# Altium PCB I2C_module_v1.PcbDoc (part 1 of 4)
Units mil, origin at the board's own origin, x right, y up, seen from the top; angles counter-clockwise.
Board outline 3300 x 2890 mil, 2 copper layers (Top Layer, Bottom Layer); 41 components, 28 nets, 177 pads, 28 vias.
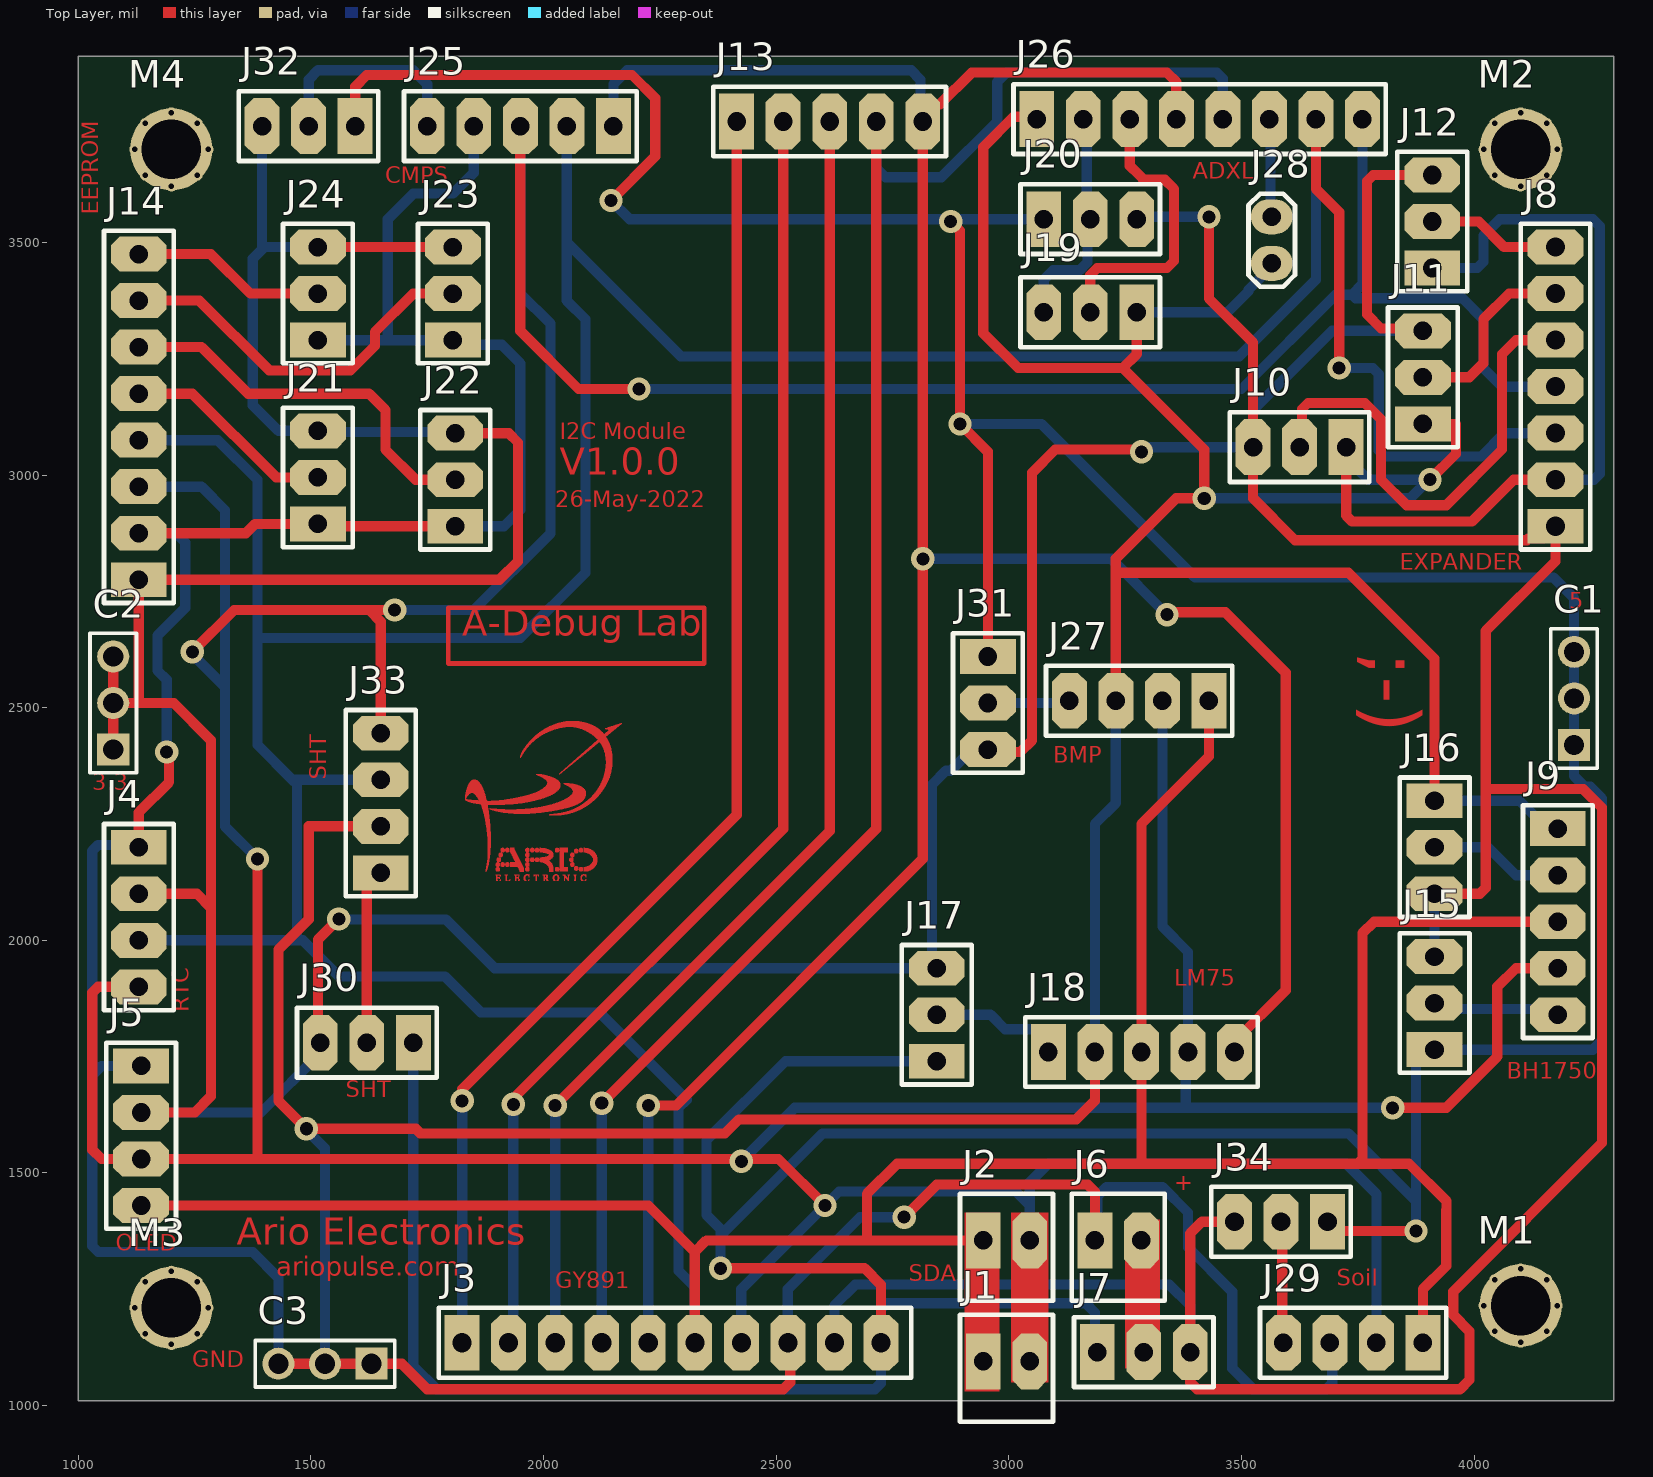
[diagram p0: Top Layer view]
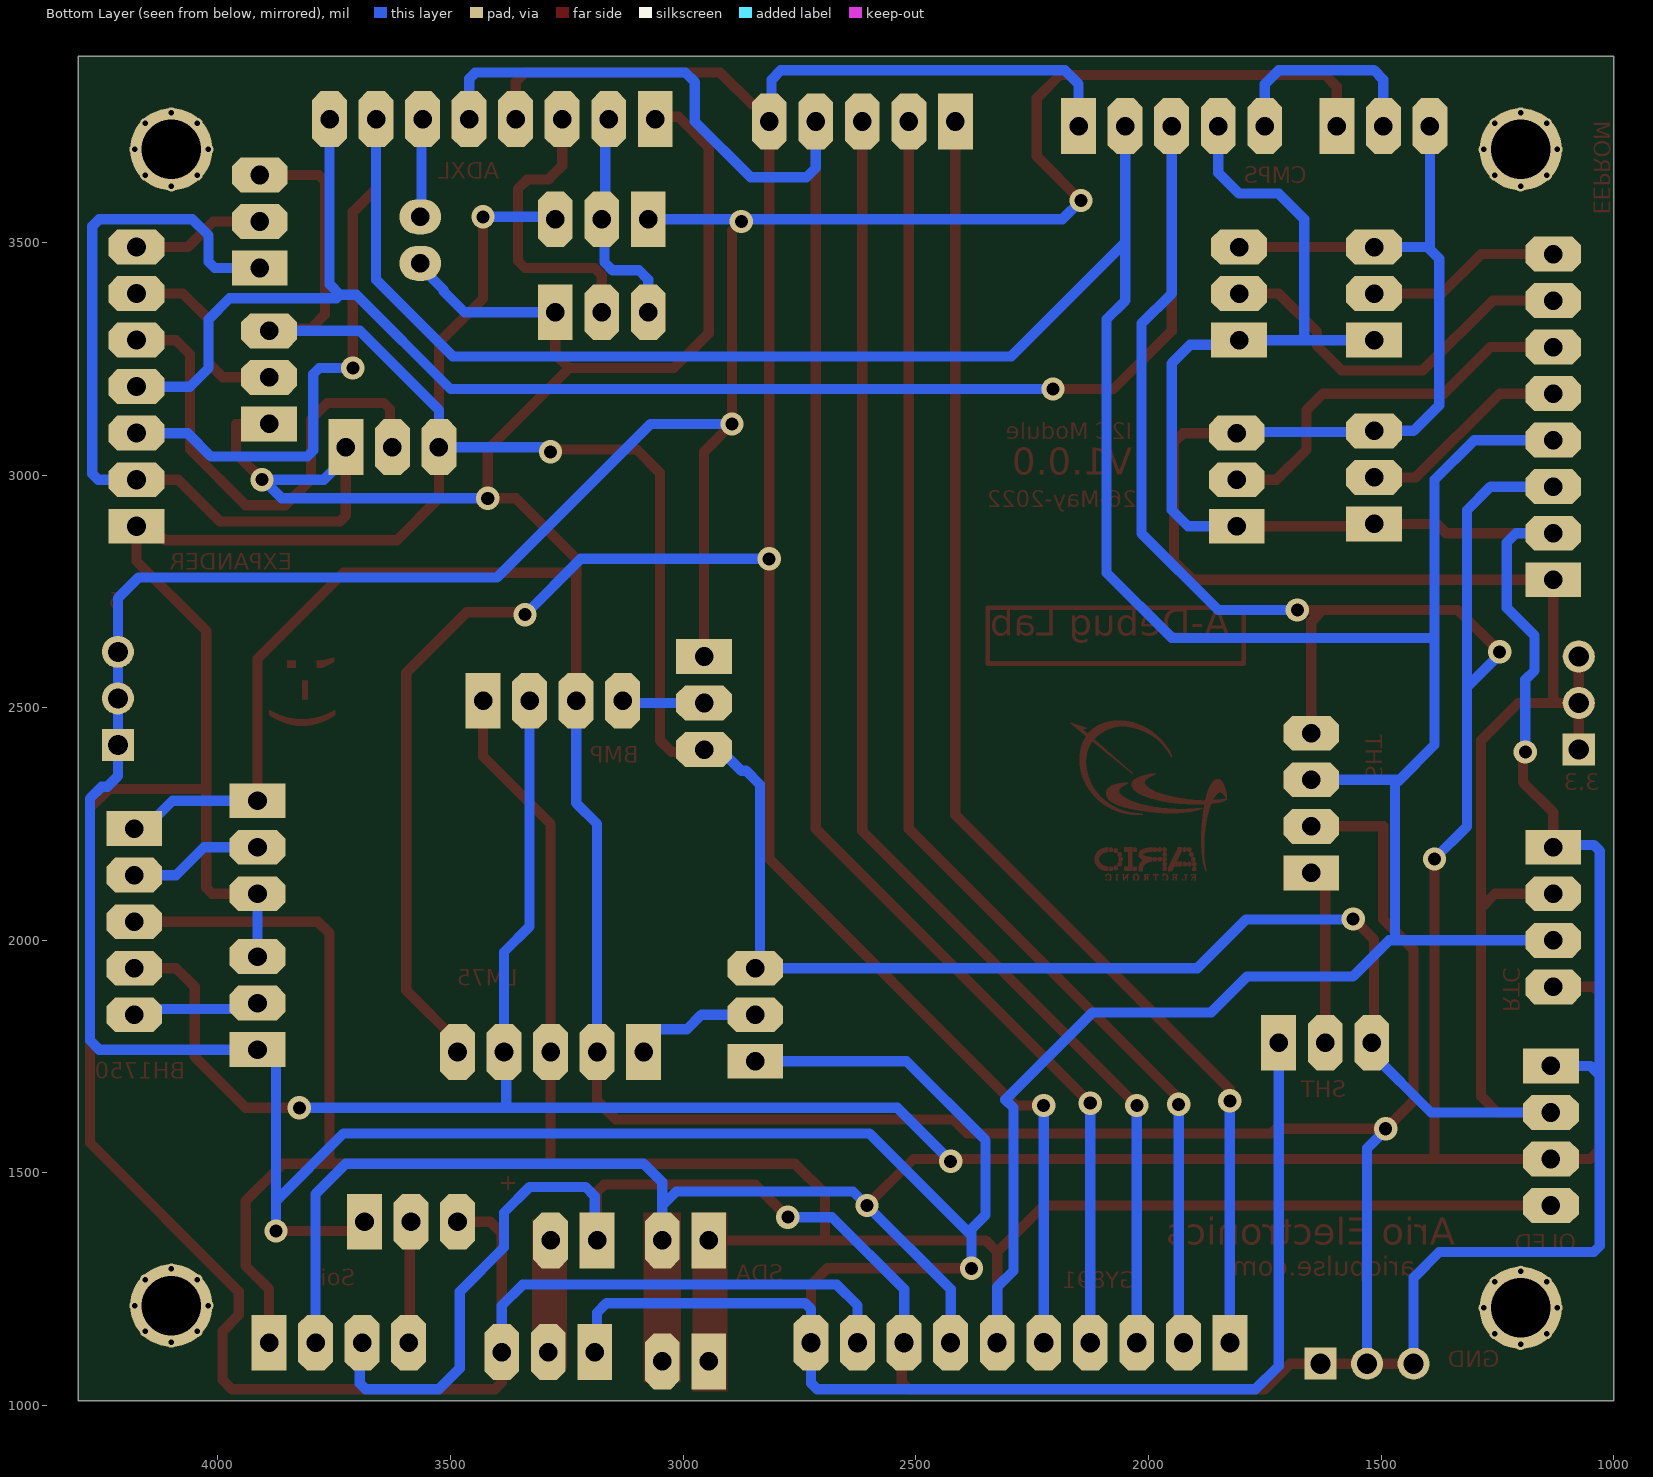
[diagram p1: Bottom Layer view, seen from below]

## Layer stack, top to bottom
Top Solder: solder mask 0.4, Solder Resist, Dk 3.5
Top Layer: signal copper 1.4
Dielectric 1: dielectric 12.6, FR-4, Dk 4.8
Bottom Layer: signal copper 1.4
Bottom Solder: solder mask 0.4, Solder Resist, Dk 3.5

## Board outline
1000,1010 4300,1010 4300,3900 1000,3900

## Design rules (kind name [scope] priority, off if disabled: settings)
Clearance [All] p1: gap=10 ignorepadtopadclearanceinfootprint=FALSE except(0: Arc-Hole Track-Hole SMDPad-Hole THPad-Hole Via-Hole Fill-Hole Poly-Hole Region-Hole Text-Hole)
PolygonConnect [All] p1: connectstyle=Relief reliefconductorwidth=10 reliefentries=4 polygonreliefangle="90 Angle" airgapwidth=10
RoutingVias [All] p1: holewidth=28 width=50 viastyle="Through Hole" minholewidth=28 minwidth=50 maxholewidth=28 maxwidth=50
SolderMaskExpansion [All] p1: expansion=4 istentingtop=FALSE
Width [All] p1: maxlimit=22 minlimit=22 preferedwidth=22 minimp=50.000000 maximp=50.000000 favimp=50.000000
30 further rules are at their usual default settings.

## Components (designator, comment, footprint, x,y, rotation, side; value= is the part's Value field where it differs from the comment)
C1 "+5v" "Header 3 Pin" 4266.06,2368.27 r90 top
C2 "+3.3v" "Header 3 Pin" 1126.06,2358.27 r90 top
C3 "GND" "Header 3 Pin" 1681.73,1141.06 r180 top
J1 "INPUT" SIP2 2945,1095 r0 top
J2 "OUTPUT" SIP2 2945,1355 r0 top
J3 "IMU GY801" SIP10 1790,1195 r0 top
J4 "DS1307/3231" SIP4 1130,2200 r270 top
J5 "OLED" SIP4 1135,1730 r270 top
J6 "OUTPUT" SIP2 3185,1355 r0 top
J7 "JUMPER" SIP3 3190,1115 r0 top
J8 "PCF85 IO Expander" SIP7 4175,2890 r90 top
J9 "BH1750" SIP5 4180,2240 r270 top
J10 "JUMPER" SIP3 3725,3060 r180 top
J11 "JUMPER" SIP3 3890,3110 r90 top
J12 "JUMPER" SIP3 3910,3445 r90 top
J13 "IO OUT" SIP5 2415,3760 r0 top
J14 "AT EEPROM" SIP8 1130,2775 r90 top
J15 "JUMPER" SIP3 3915,1765 r90 top
J16 "JUMPER" SIP3 3915,2300 r270 top
J17 "JUMPER" SIP3 2845,1740 r90 top
J18 "LM75" SIP5 3085,1760 r0 top
J19 "JUMPER" SIP3 3275,3350 r180 top
J20 "JUMPER" SIP3 3075,3550 r0 top
J21 "JUMPER" SIP3 1515,2895 r90 top
J22 "JUMPER" SIP3 1810,2890 r90 top
J23 "JUMPER" SIP3 1805,3290 r90 top
J24 "JUMPER" SIP3 1515,3290 r90 top
J25 "COMPASS" SIP5 2150,3750 r180 top
J26 "ADXL345" SIP8 3060,3765 r0 top
J27 "BMP180" SIP4 3430,2515 r180 top
J28 "JUMPER2" JUMP2 3565,3455 r90 top
J29 "Soil" SIP4 3890,1135 r180 top
J30 "JUMPER" SIP3 1720,1780 r180 top
J31 "JUMPER" SIP3 2955,2610 r270 top
J32 "JUMPER" SIP3 1595,3750 r180 top
J33 "SHTxx" SIP4 1650,2145 r90 top
J34 "JUMPER" SIP3 3685,1395 r180 top
M1 "Screw" "Board Screw_No Silk" 4100,1215 r0 top
M2 "Screw" "Board Screw_No Silk" 4100,3700 r0 top
M3 "Screw" "Board Screw_No Silk" 1200,1210 r0 top
M4 "Screw" "Board Screw_No Silk" 1200,3700 r0 top

## Footprints (in the part's own frame and the unit in brackets; to place one, negate y for a bottom-side part, rotate by r counter-clockwise, add the part's x,y. Pads: shape width x height; smd on the part's side, far side on the other; paste and mask are expansions set on the pad)
"Board Screw_No Silk" [mm]
  round 0.6 hole 0.3: S(-2,0) S(-1.414,-1.414) S(-1.414,1.414) S(0,-2) S(0,2) S(1.414,-1.414) S(1.414,1.414) S(2,0)
  round 4.5 hole 3.25 mask+0.1: S(0,0)
"Header 3 Pin" [mm]
  rect 1.75x1.75 hole 1.1: 1(1.314,1.297)
  round 1.75 hole 1.1: 2(3.854,1.297) 3(6.394,1.297)
  silkscreen extent 0.04,0.03 7.66,2.57, body extent -0.06,-0.1 7.56,2.44, height 6.71
JUMP2 [mil]
  oval 75x90 hole 40: 1(0,0) 2(100,0)
  silkscreen extent -50,-50 150,50
SIP2 [mil]
  rect 75x120 hole 40: 1(0,0)
  oct 75x120 hole 40: 2(100,0)
  silkscreen extent -50,-130 150,100
SIP3 [mil]
  rect 75x120 hole 40: 1(0,0)
  oct 75x120 hole 40: 2(100,0) 3(200,0)
  silkscreen extent -50,-75 250,75
SIP4 [mil]
  rect 75x120 hole 40: 1(0,0)
  oct 75x120 hole 40: 2(100,0) 3(200,0) 4(300,0)
  silkscreen extent -50,-75 350,75
SIP5 [mil]
  rect 75x120 hole 40: 1(0,0)
  oct 75x120 hole 40: 2(100,0) 3(200,0) 4(300,0) 5(400,0)
  silkscreen extent -50,-75 450,75
SIP7 [mil]
  rect 75x120 hole 41: 1(0,0)
  oct 75x120 hole 41: 2(100,0) 3(200,0) 4(300,0) 5(400,0) 6(500,0) 7(600,0)
  silkscreen extent -50,-75 650,75
SIP8 [mil]
  rect 75x120 hole 40: 1(0,0)
  oct 75x120 hole 40: 2(100,0) 3(200,0) 4(300,0) 5(400,0) 6(500,0) 7(600,0) 8(700,0)
  silkscreen extent -50,-75 750,75
SIP10 [mil]
  rect 75x120 hole 41: 1(35,-60)
  oct 75x120 hole 41: 2(135,-60) 3(235,-60) 4(335,-60) 5(435,-60) 6(535,-60) 7(635,-60) 8(735,-60) 9(835,-60) 10(935,-60)
  silkscreen extent -15,-135 1000,15

## Part data
C1 C2 C3: library part Header-3
J1 J2 J6: library part 2PIN
J3: library part 10PIN
J4 J5 J27 J29 J33: library part 4PIN
J7 J10 J11 J12 J15 J16 J17 J19 J20 J21 J22 J23 J24 J30 J31 J32 J34: library part JUMPER3, "JUMPER 3 PIN [ 3 OPTION ]"
J8: library part 7PIN
J9 J13 J18 J25: library part 5PIN
J14 J26: library part 8PIN
J28: "Ju,per & dip Switch"
M1 M2 M3 M4: library part "Board Screw", "Board Screw With Spacer"

## Via types
v1: diameter 50, hole 28, Top Layer to Bottom Layer, 28 vias

## Nets (pads, with @x,y where several pads share a name; then routed paths per layer and width w, separated by ;. In a path a pad name is that pad's centre, name@x,y a point inside that pad or via, vN(x,y) a via of type N, cw(c..) or ccw(c..) an arc to the next point about the centre after c; other vN are vias at no path point)
+3.3V: C2.1 C2.2 C2.3 J3.9 J4.2 J5.2 J7.3 J8.1 J10.3 J11.3 J12.3 J14.1 J15.3 J16.3 J17.3 J20.3 J21.3 J22.3 J23.3 J24.3 J30.3 J31.3 J32.3 J34.3 | length 15666.5
  Top Layer w22: C2.1@1075,2410 C2.2@1075,2510 ; C2.3@1075,2610 C2.2@1075,2510 ; J4.2@1130,2100 1255,2100 1285,2070 ; J5.2@1135,1630 1250,1630 1285,1665 1285,2070 ; J24.3@1515,3490 J23.3@1805,3490 ; J30.3@1520,1780 1515,1785 1515,2001 v1(1560,2046) ; J22.3@1810,3090 1925,3090 1945,3070 1945,2815 1905,2775 J14.1@1130,2775 1130,2515 1135,2510 ; J31.3@2955,2410 2960,2405 3025,2405 3050,2430 3050,3005 3100,3055 3270,3055 3275,3050 v1(3285,3050) ; v1(3430,3555) 3430,3379.5 3525,3284.5 J10.3@3525,3060 3525,2950 3615,2860 4113.11,2860 4116.61,2863.5 4148.5,2863.5 J8.1@4175,2890 4175,2815 4025,2665 4025,2325 ; J34.3@3485,1395 3415,1395 3390,1370 J7.3@3390,1115 3390,1050 3405,1035 3970,1035 3990,1055 3990,1160 3955,1195 3955,1245 4275,1565 4275,2285 4235,2325 4025,2325 ; J11.3@3890,3310 3885,3315 3800,3315 3770,3345 3770,3632.11 3782.89,3645 J12.3@3910,3645 ; J16.3@3915,2100 4012.11,2100 4025,2112.89 4025,2325 ; C2.2@1075,2510 1135,2510 ; 1135,2510 1205,2510 1285,2430 1285,2070
  Bottom Layer w22: J5.2@1135,1630 1392.5,1630 1520,1757.5 J30.3@1520,1780 ; J32.3@1395,3750 1395,3485 ; J24.3@1515,3490 1400,3490 1395,3485 ; v1(1560,2046) 1561,2045 1790,2045 1895,1940 J17.3@2845,1940 2835,1950 2835,2335 2864.69,2364.69 2874.89,2364.69 2920.19,2410 J31.3@2955,2410 ; J22.3@1810,3090 1807.5,3092.5 1517.5,3092.5 J21.3@1515,3095 1430,3095 1375,3150 1375,3465 1395,3485 ; J3.9@2625,1135 2625,1215 2670,1260 3345,1260 3390,1215 J7.3@3390,1115 ; J20.3@3275,3550 3280,3555 v1(3430,3555) ; v1(3285,3050) 3292.58,3050 3302.58,3060 J10.3@3525,3060 3525,3140 3695,3310 J11.3@3890,3310 ; J15.3@3915,1965 J16.3@3915,2100
+5V: C1.1 C1.2 C1.3 J3.10 J7.1 J15.1 J17.1 J20.1 J30.1 J31.1 J32.1 J34.1 | length 11802.9
  Top Layer w22: J32.1@1595,3750 1595,3835 1620,3860 2190,3860 2240,3810 2240,3685 v1(2145,3590) ; v1(2380,1295) 2690,1295 2725,1260 J3.10@2725,1135 ; v1(2875,3545) 2895,3525 v1(2895,3110) 2955,3050 J31.1@2955,2610 ; J34.1@3685,1395 3705,1375 v1(3875,1375)
  Bottom Layer w22: J30.1@1720,1780 1720,1085 1770,1035 2712.11,1035 2725,1047.89 J3.10@2725,1135 2725,1207.11 2737.89,1220 3165,1220 3185,1200 3185,1120 J7.1@3190,1115 ; v1(2145,3590) 2185,3550 J20.1@3075,3550 ; v1(2380,1295) 2380,1365 ; J17.1@2845,1740 2520,1740 2350,1570 2350,1410 2380,1380 2380,1365 ; v1(2895,3110) 3070,3110 3400,2780 4170,2780 4215,2735 C1.3@4215,2620 C1.2@4215,2520 C1.1@4215,2420 4215,2352.89 4237.89,2330 4250,2330 4275,2305 4275,1785 4255,1765 J15.1@3915,1765 3901.5,1765 3875,1738.5 3875,1440 ; v1(3875,1375) 3875,1440 ; 2380,1365 2600,1585 3730,1585 3875,1440
GND: C3.1 C3.2 C3.3 J3.8 J4.1 J5.1 J6.1 J8.2 J9.1 J10.1 J11.1 J12.1 J14.2 J16.1 J18.2 J19.1 J21.1 J22.1 J23.1 J24.1 J25.4 J26.1 J27.3 J28.1 J29.3 J33.2 | length 18176.2
  Top Layer w22: J4.1@1130,2200 1130,2275 1195,2340 1195,2400 v1(1190,2405) ; J14.2@1130,2875 1360,2875 1380,2895 J21.1@1515,2895 1520,2890 J22.1@1810,2890 ; C3.3@1430,1090 C3.2@1530,1090 C3.1@1630,1090 1695,1090 1750,1035 2515,1035 2530,1050 2530,1130 J3.8@2525,1135 ; J33.2@1650,2245 1495,2245 1495,2045 1430,1980 1430,1655 v1(1490,1595) 1725,1595 1735,1585 2390,1585 2420,1615 3145,1615 3185,1655 J18.2@3185,1760 ; v1(2775,1405) 2845,1475 3170,1475 3185,1460 J6.1@3185,1355 ; J26.1@3060,3765 3055,3770 3010,3770 2945,3705 2945,3305 3020,3230 3245,3230 ; J27.3@3230,2515 3230,2785 ; J19.1@3275,3350 3275,3260 3245,3230 ; J10.1@3725,3060 3725,2912.89 3737.89,2900 3995,2900 4085,2990 J8.2@4175,2990 ; J11.1@3890,3110 3960,3110 3961,3109 3961,3046 v1(3905,2990) ; J16.1@3915,2300 3915,2605 3730,2790 3235,2790 3230,2785 ; 3230,2785 3230,2820 3360,2950 v1(3420,2950) 3420,3055 3245,3230
  Bottom Layer w22: J4.1@1130,2200 1125,2205 1042.89,2205 1030,2192.11 1030,1710 ; J14.2@1130,2875 1210,2875 1230,2855 1230,2715 1170,2655 1170,2580 1190,2560 v1(1190,2405) ; J5.1@1135,1730 1050,1730 1030,1710 ; C3.3@1430,1090 1430,1275 1375,1330 1042.89,1330 1030,1342.89 1030,1710 ; v1(1490,1595) 1490,1592.98 1530,1552.98 C3.2@1530,1090 ; J24.1@1515,3290 1660,3290 ; J22.1@1810,2890 1915,2890 1950,2925 1950,3240 1910,3280 1815,3280 J23.1@1805,3290 1660,3290 ; J25.4@1850,3750 1850,3650 1805,3605 1720,3605 1665,3550 1665,3295 1660,3290 ; J3.8@2525,1135 2525,1250 2680,1405 v1(2775,1405) ; J6.1@3185,1355 3190,1360 3190,1450 3210,1470 3330,1470 3385,1415 3385,1340 3480,1245 3480,1080 3525,1035 3682.11,1035 3695,1047.89 3695,1130 J29.3@3690,1135 ; J18.2@3185,1760 3185,2250 3230,2295 J27.3@3230,2515 ; J19.1@3275,3350 3470,3350 3515,3395 3515,3398.16 3565,3448.16 J28.1@3565,3455 ; v1(3420,2950) 3862.98,2950 v1@3902.98,2990 ; J10.1@3725,3060 3725,3037.5 3772.5,2990 v1@3902.98,2990 ; v1(3905,2990) v1@3902.98,2990 ; J12.1@3910,3445 4007.11,3445 4020,3457.89 4020,3515 4055,3550 4255,3550 4270,3535 4270,3002.89 4257.11,2990 J8.2@4175,2990 ; J16.1@3915,2300 4097.5,2300 4157.5,2240 J9.1@4180,2240
NetJ1_1: J1.1 J2.1 J3.6 J4.3 J5.4 J8.3 J9.3 J14.4 J18.3 J25.2 J26.7 J27.1 J29.1 J33.3 | length 14244.7
  Top Layer w22: J5.4@1115,1430 J5.4@1135,1430 2225,1430 2325,1330 ; J3.6@2325,1135 2325,1330 ; J2.1@2945,1355 2690,1355 ; J27.1@3430,2515 3430,2395 3285,2250 J18.3@3285,1760 3285,1520 ; J26.7@3660,3765 3660,3615 3710,3565 v1(3710,3230) ; J29.1@3890,1135 3890,1250 3940,1300 3940,1420 3940.89,1420.89 3940.89,1439.11 3860,1520 3750,1520 ; J9.3@4180,2040 3785,2040 3760,2015 3760,1530 3750,1520 ; 2325,1330 2350,1355 2690,1355 ; 2690,1355 2695,1360 2695,1455 2760,1520 3285,1520 ; 3285,1520 3750,1520
  Bottom Layer w22: J4.3@1130,2000 1470,2000 ; J14.4@1130,3075 1300,3075 1385,2990 1385,2650 ; J33.3@1650,2345 1460,2345 ; J25.2@2050,3750 2050,3500 ; J3.6@2325,1135 2325,1255 2290,1290 2290,1640 2307.5,1657.5 2120,1845 1865,1845 1787.5,1922.5 1560,1922.5 1482.5,2000 1470,2000 ; J26.7@3660,3765 3660,3420 3495,3255 2295,3255 2050,3500 ; v1(3710,3230) 3782.11,3230 3795,3217.11 3795,3052.89 3807.89,3040 4015,3040 4065,3090 J8.3@4175,3090 ; 1385,2650 1385,2420 1460,2345 ; 1385,2650 1950,2650 2090,2790 2090,3335 2050,3375 2050,3500 ; 1460,2345 1470,2335 1470,2000
NetJ1_2: J1.2 J2.2 J3.7 J4.4 J5.3 J8.4 J9.4 J14.3 J18.4 J25.3 J26.8 J27.2 J29.2 J33.4 | length 14167.1
  Top Layer w22: J4.4@1130,1900 1042.89,1900 1030,1887.11 1030,1550 1050,1530 J5.3@1135,1530 1385,1530 ; v1(1245,2620) 1335,2710 1625,2710 ; v1(1385,2175) 1385,1530 ; J33.4@1650,2445 1650,2685 1625,2710 ; v1(1680,2710) 1625,2710 ; J25.3@1950,3750 1950,3310 2075,3185 v1(2205,3185) ; v1(2605,1430) 2505,1530 1385,1530 ; v1(3825,1640) 3940,1640 4050,1750 4050,1900 4090,1940 J9.4@4180,1940
  Bottom Layer w22: J14.3@1130,2975 1265,2975 1315,2925 1315,2545 ; v1(1245,2620) 1245,2615 1315,2545 ; v1(1385,2175) 1315,2245 1315,2545 ; v1(1680,2710) 1850,2710 2015,2875 2015,3325 1950,3390 J25.3@1950,3750 ; v1(2205,3185) 3500,3185 3702.5,3387.5 3737.5,3387.5 ; J3.7@2425,1135 2425,1250 v1(2605,1430) 2635,1460 3015,1460 3045,1430 ; v1(2425,1525) 2540,1640 3380,1640 ; J2.2@3045,1355 3045,1430 ; J27.2@3330,2515 3330,2030 3385,1975 J18.4@3385,1760 3380,1755 3380,1640 ; J26.8@3760,3765 3760,3410 3737.5,3387.5 ; J29.2@3790,1135 3790,1455 3725,1520 3085,1520 3045,1480 3045,1430 ; v1(3825,1640) 3380,1640 ; J8.4@4175,3190 4060,3190 4020,3230 4020,3335 3975,3380 3745,3380 3737.5,3387.5
NetJ3_1: J3.1 J13.1 | length 2869.4
  Top Layer w22: v1(1825,1655) 1825,1680 2415,2270 J13.1@2415,3760
  Bottom Layer w22: J3.1@1825,1135 v1(1825,1655)
NetJ3_2: J3.2 J13.2 | length 2869.4
  Top Layer w22: v1(1935,1647.5) 1935,1660 2515,2240 J13.2@2515,3760
  Bottom Layer w22: J3.2@1925,1135 1935,1145 v1(1935,1647.5)
NetJ3_3: J3.3 J13.3 | length 2869.4
  Top Layer w22: v1(2025,1645) 2615,2235 J13.3@2615,3760
  Bottom Layer w22: J3.3@2025,1135 v1(2025,1645)
NetJ3_4: J3.4 J13.4 J26.5 | length 3958.1
  Top Layer w22: v1(2125,1650) 2715,2240 J13.4@2715,3760
  Bottom Layer w22: J3.4@2125,1135 v1(2125,1650) ; J13.4@2715,3760 2715,3660 2735,3640 2855,3640 2975,3760 2975,3845 2995,3865 3447.11,3865 3460,3852.11 J26.5@3460,3765
NetJ3_5: J3.5 J13.5 J18.5 J25.1 J26.4 | length 6196.3
  Top Layer w22: v1(2225,1645) 2285,1645 2815,2175 v1(2815,2820) J13.5@2815,3760 2815,3770.19 2841.5,3796.69 2851.69,3796.69 2920,3865 3340,3865 3360,3845 J26.4@3360,3765 ; v1(3340,2700) 3345,2705 3465,2705 3595,2575 3595,1892.5 3485,1782.5 J18.5@3485,1760
  Bottom Layer w22: J25.1@2150,3750 2150,3840 2180,3870 2790,3870 2810,3850 2810,3765 J13.5@2815,3760 ; J3.5@2225,1135 v1(2225,1645) ; v1(2815,2820) 3220,2820 v1(3340,2700)
NetJ6_2: J6.2 J7.2
NetJ8_5: J8.5 J10.2 | length 1068.9
  Top Layer w22: J10.2@3625,3060 3630,3065 3630,3142.11 3642.89,3155 3765,3155 3800,3120 3800,2990 3855,2935 3940,2935 4060,3055 4060,3260 4090,3290 J8.5@4175,3290
NetJ8_6: J8.6 J11.2 | length 415.2
  Top Layer w22: J11.2@3890,3210 3990,3210 4020,3240 4020,3335 4075,3390 J8.6@4175,3390
NetJ8_7: J8.7 J12.2 | length 287.8
  Top Layer w22: J12.2@3910,3545 4010,3545 4065,3490 J8.7@4175,3490
NetJ9_2: J9.2 J16.2 | length 289.9
  Bottom Layer w22: J16.2@3915,2200 4030,2200 4090,2140 J9.2@4180,2140
NetJ9_5: J9.5 J15.2 | length 275.4
  Bottom Layer w22: J15.2@3915,1865 3927.5,1852.5 4167.5,1852.5 J9.5@4180,1840
NetJ14_5: J14.5 J21.2 | length 459.6
  Top Layer w22: J14.5@1130,3175 1245,3175 1425,2995 J21.2@1515,2995
NetJ14_6: J14.6 J22.2 | length 847.8
  Top Layer w22: J14.6@1130,3275 1265,3275 1365,3175 1625,3175 1660,3140 1660,3055 1725,2990 J22.2@1810,2990
NetJ14_7: J14.7 J23.2 | length 823.1
  Top Layer w22: J14.7@1130,3375 1260,3375 1410,3225 1585,3225 1637.5,3277.5 1637.5,3307.5 1720,3390 J23.2@1805,3390
NetJ14_8: J14.8 J24.2 | length 420.2
  Top Layer w22: J14.8@1130,3475 1285,3475 1370,3390 J24.2@1515,3390
NetJ17_2: J17.2 J18.1 | length 286.3
  Bottom Layer w22: J17.2@2845,1840 2960.75,1840 2991.75,1809 3058.5,1809 3085,1782.5 J18.1@3085,1760
NetJ19_2: J19.2 J26.3 | length 643.1
  Top Layer w22: J19.2@3175,3350 3175,3430 3190,3445 3340,3445 3355,3460 3355,3615 3335,3635 3290,3635 3280.04,3644.96 3260,3665 J26.3@3260,3765
NetJ19_3: J19.3 J20.2 J26.2 | length 496.1
  Bottom Layer w22: J19.3@3075,3350 3075,3420 3095,3440 3152.11,3440 3169.11,3457 3169.11,3544.11 J20.2@3175,3550 3167.5,3557.5 3167.5,3757.5 J26.2@3160,3765
NetJ25_5: J25.5 J32.2 | length 465.7
  Bottom Layer w22: J32.2@1495,3750 1495,3850 1515,3870 1720,3870 1750,3840 J25.5@1750,3750
NetJ26_6: J26.6 J28.2 | length 212.1
  Bottom Layer w22: J26.6@3560,3765 3562.5,3762.5 3562.5,3557.5 J28.2@3565,3555
NetJ27_4: J27.4 J31.2 | length 177.1
  Bottom Layer w22: J31.2@2955,2510 3125,2510 J27.4@3130,2515
NetJ29_4: J29.4 J34.2 | length 262.1
  Top Layer w22: J34.2@3585,1395 3587.5,1392.5 3587.5,1137.5 J29.4@3590,1135
NetJ30_2: J30.2 J33.1 | length 379.5
  Top Layer w22: J30.2@1620,1780 1620,2118.5 1646.5,2145 J33.1@1650,2145
pads on no net: M1.S M2.S M3.S M4.S
copper on no net: | length 58846.1